# EAGLE board Adapter_board (EAGLE 7.7.0)
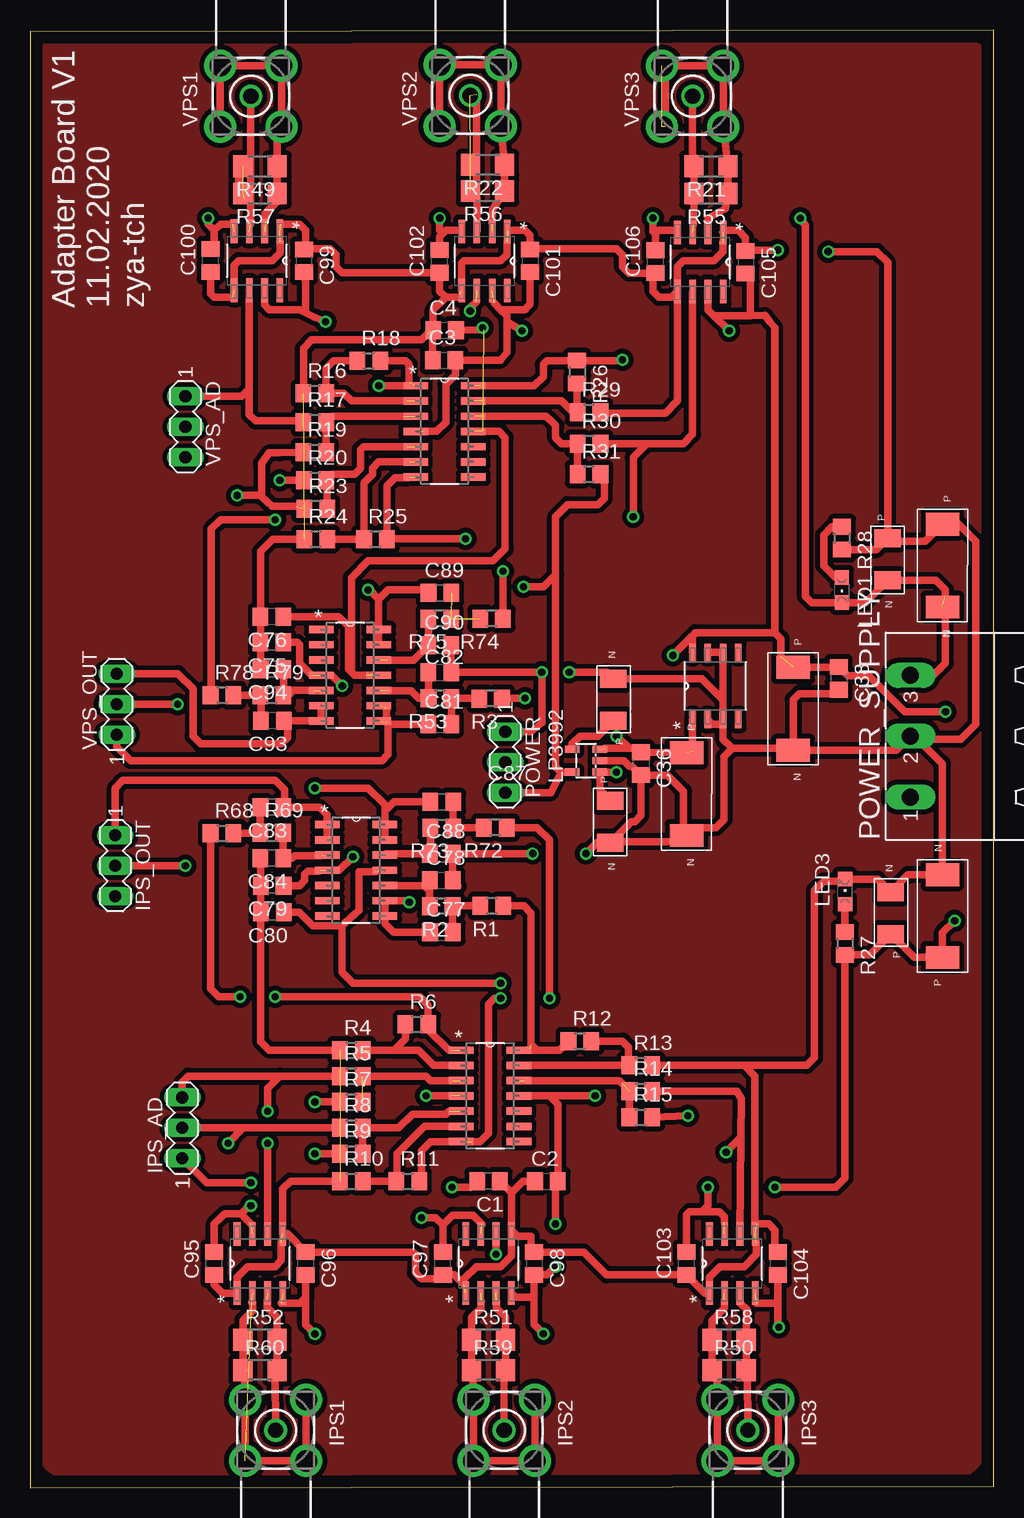
[diagram p0: board, top side]
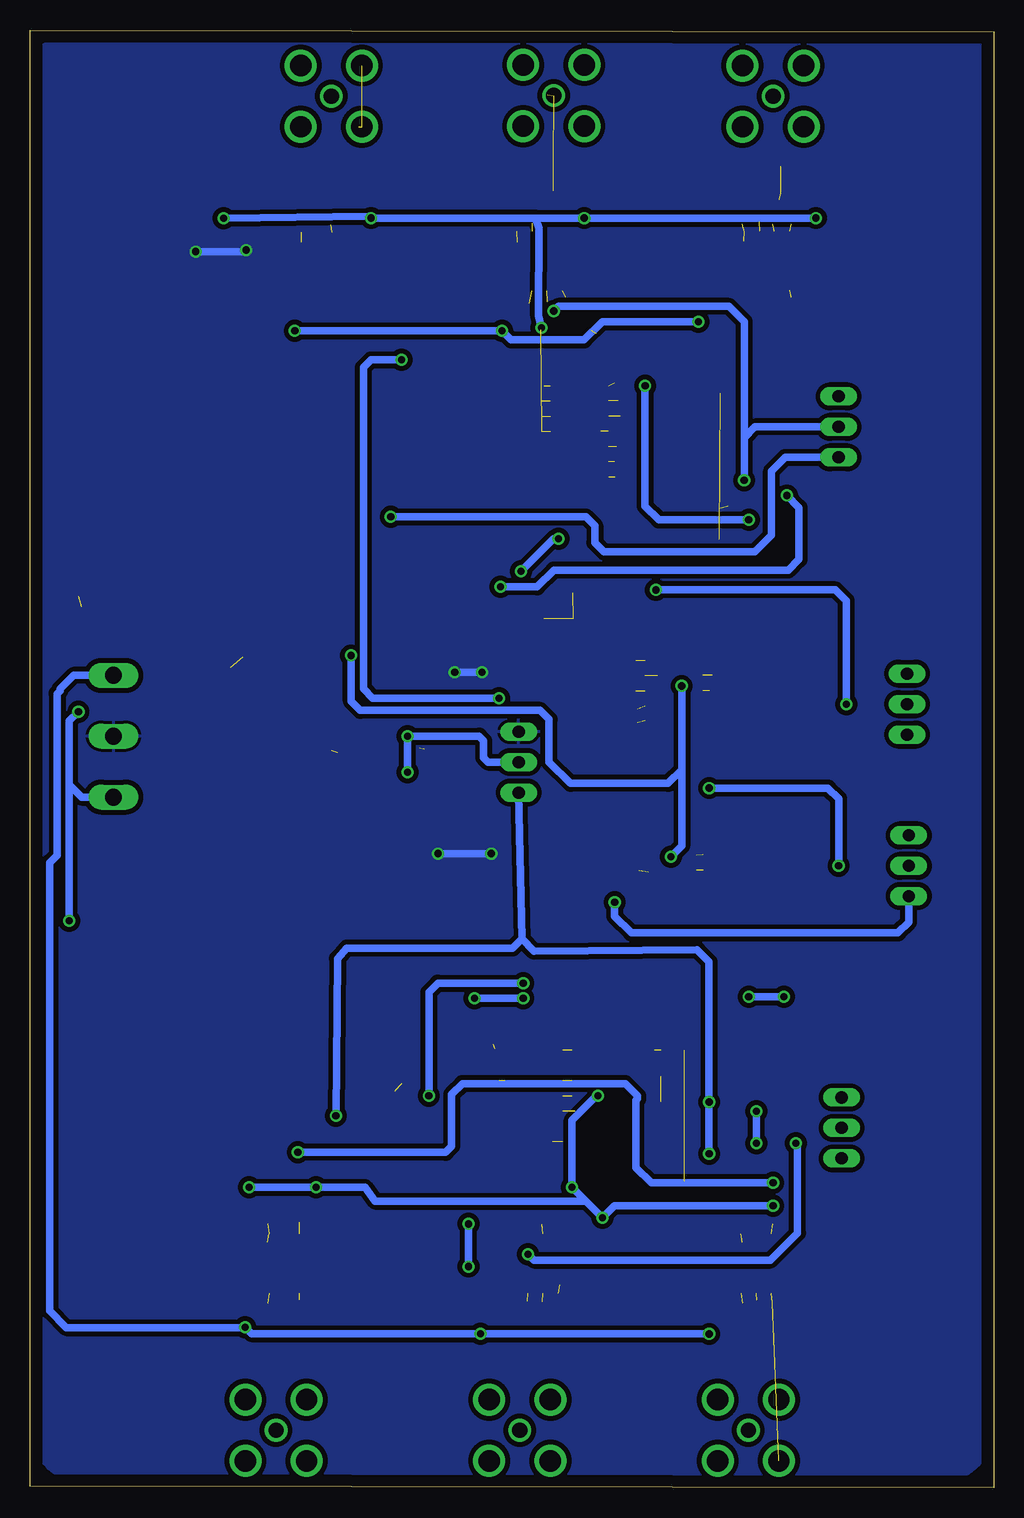
[diagram p1: board, bottom side, seen from below]

Size 80.37 x 121.46 mm. Coordinates in mm from the lower left corner, seen from the top.
Outline: 0,0 80.37,0.13 80.37,121.46 0,121.34 0,0
Copper layers (1*16): Top 0.035mm / dielectric 1.5mm / Bottom 0.035mm
Design rules "default *": minimum track width 10mil, minimum drill 24mil, track to track 8mil, track to pad 8mil, pad to pad 8mil, via to via 8mil, smd to smd 8mil, copper to edge 40mil, drill to drill 8mil, minimum pad ring 10mil, minimum via ring 8mil, stop-mask expansion 4mil, vias tented up to drill 0mil, thermal gap 10mil

## Footprints (pad centres in the part's own frame; a part is rotated, then mirrored left to right if it is on the bottom)
78L05CD15V5V_LIB = smd 1.422 x 0.533: 1 -2.927,1.787; 2 -2.927,0.517; 3 -2.927,-0.753; 4 -2.927,-2.023; 5 2.661,-2.023; 6 2.661,-0.753; 7 2.661,0.517; 8 2.661,1.787
C0805 = smd 1.3 x 1.5: 1 -0.95,0; 2 0.95,0
TANTALUM_C_10UF_KEM = smd 1.9 x 2.8: N 3.45,0; P -3.45,0
BU-SMA-H = drill 1.27: 1 0,0 | drill 1.778: 2 -2.55,2.55; 3 2.55,2.55; 4 2.55,-2.55; 5 -2.55,-2.55
MA03-1 = drill 1.016 long: 1 -2.54,0; 2 0,0; 3 2.54,0
CHIPLED_0805 = smd 1.2 x 1.2: A 0,-1.05; C 0,1.05
SOT23-5L = smd 0.6 x 1.2: 1 -0.95,-1.15; 2 0,-1.15; 3 0.95,-1.15; 4 0.95,1.15; 5 -0.95,1.15
MSTBA3 = drill 1.397 long: 1 -5.08,5.08; 2 0,5.08; 3 5.08,5.08
R0805 = smd 1.3 x 1.5: 1 -0.95,0; 2 0.95,0
R1206 = smd 1.6 x 1.803: 1 -1.422,0; 2 1.422,0
TL084/SO_OP_LIB = smd 2.057 x 0.61: 1 -2.261,3.81; 2 -2.261,2.54; 3 -2.261,1.27; 4 -2.261,0; 5 -2.261,-1.27; 6 -2.261,-2.54; 7 -2.261,-3.81; 8 2.54,-3.81; 9 2.54,-2.54; 10 2.54,-1.27; 11 2.54,0; 12 2.54,1.27; 13 2.54,2.54; 14 2.54,3.81
TANTALUM_C_1UF_KEM = smd 1.5 x 2.2: N 1.75,0; P -1.75,0
AD629_DIFFA_LIB = smd 1.981 x 0.559: 1 -2.464,1.905; 2 -2.464,0.635; 3 -2.464,-0.635; 4 -2.464,-1.905; 5 2.464,-1.905; 6 2.464,-0.635; 7 2.464,0.635; 8 2.464,1.905

## Placement (x,y rotation side)
78L05  78L05CD15V5VONLINE  [78L05CD15V5V_LIB]  57.02,66.93 90 top
C1  0.1u  [C0805]  38.23,25.53 180 top
C2  0.1u  [C0805]  43.05,25.53 0 top
C3  0.1u  [C0805]  34.52,93.95 0 top
C4  0.1u  [C0805]  34.57,96.44 0 top
C36  100n  [C0805]  50.93,60.32 270 top
C37  TANTALUM_C_10UF_KEM  [TANTALUM_C_10UF_KEM]  54.74,57.78 270 top
C38  100n  [C0805]  67.44,67.44 270 top
C75  0.1u  [C0805]  20.17,70.42 180 top
C76  0.1u  [C0805]  20.17,72.57 180 top
C77  2n  [C0805]  34.3,46.28 0 top
C78  1n  [C0805]  34.29,50.6 0 top
C79  0.1u  [C0805]  20.19,50.16 180 top
C80  0.1u  [C0805]  20.21,47.93 180 top
C81  2n  [C0805]  34.16,63.61 0 top
C82  1n  [C0805]  34.16,67.95 0 top
C83  2n  [C0805]  20.18,56.68 180 top
C84  1n  [C0805]  20.17,52.44 180 top
C87  2n  [C0805]  34.34,57.14 0 top
C88  1n  [C0805]  34.29,52.81 0 top
C89  2n  [C0805]  34.18,74.56 0 top
C90  1n  [C0805]  34.16,70.21 0 top
C93  2n  [C0805]  20.21,63.89 180 top
C94  1n  [C0805]  20.18,68.2 180 top
C95  0.1u  [C0805]  15.37,18.67 90 top
C96  0.1u  [C0805]  22.99,18.67 270 top
C97  0.1u  [C0805]  34.42,18.67 90 top
C98  0.1u  [C0805]  42.04,18.67 270 top
C99  0.1u  [C0805]  22.83,102.23 270 top
C100  0.1u  [C0805]  15.06,102.26 90 top
C101  0.1u  [C0805]  41.68,102.23 270 top
C102  0.1u  [C0805]  34.14,102.18 90 top
C103  0.1u  [C0805]  54.74,18.67 90 top
C104  0.1u  [C0805]  62.36,18.67 270 top
C105  0.1u  [C0805]  59.66,102.11 270 top
C106  0.1u  [C0805]  52.15,102.16 90 top
IPS1  BU-SMA-H  [BU-SMA-H]  20.49,4.78 270 top
IPS2  BU-SMA-H  [BU-SMA-H]  39.54,4.78 270 top
IPS3  BU-SMA-H  [BU-SMA-H]  59.86,4.78 270 top
IPS_AD  [MA03-1]  12.7,29.97 90 top
IPS_OUT  [MA03-1]  7.11,51.82 270 top
LED1  [CHIPLED_0805]  67.69,74.8 180 top
LED3  [CHIPLED_0805]  67.95,49.66 0 top
LP3992  LD398525RM  [SOT23-5L]  46.35,60.58 90 top
POWER  [MA03-1]  39.62,60.45 270 top
POWER_SUPPLY  MSTBA3  [MSTBA3]  78.49,62.61 90 top
R1  2.81k  [R0805]  38.51,48.46 180 top
R2  2.81k  [R0805]  34.28,48.44 180 top
R3  2.81k  [R0805]  38.4,65.75 180 top
R4  100k  [R0805]  26.8,36.45 0 top
R5  100k  [R0805]  26.8,34.29 0 top
R6  27.2k  [R0805]  32.26,38.61 0 top
R7  27.2k  [R0805]  26.8,32.13 0 top
R8  100k  [R0805]  26.8,29.97 0 top
R9  27.2k  [R0805]  26.8,27.81 0 top
R10  100k  [R0805]  26.8,25.53 0 top
R11  27.2k  [R0805]  31.5,25.53 0 top
R12  27.2k  [R0805]  45.85,37.21 0 top
R13  100k  [R0805]  50.93,35.18 0 top
R14  100k  [R0805]  50.93,33.02 0 top
R15  27.2k  [R0805]  50.93,30.86 0 top
R16  100k  [R0805]  23.75,91.19 0 top
R17  100k  [R0805]  23.75,88.77 0 top
R18  27.2k  [R0805]  28.24,93.9 0 top
R19  27.2k  [R0805]  23.75,86.28 0 top
R20  100k  [R0805]  23.77,83.95 0 top
R21  424  [R1206]  56.77,110.11 180 top
R22  424  [R1206]  38.15,110.24 180 top
R23  27.2k  [R0805]  23.83,81.58 0 top
R24  100k  [R0805]  23.83,79.04 0 top
R25  27.2k  [R0805]  28.8,79.04 0 top
R26  27.2k  [R0805]  45.62,92.96 270 top
R27  2k  [R0805]  67.95,45.34 270 top
R28  2k  [R0805]  67.69,79.12 270 top
R29  100k  [R0805]  46.61,89.61 0 top
R30  100k  [R0805]  46.61,87 0 top
R31  27.2k  [R0805]  46.61,84.45 0 top
R49  424  [R1206]  19.18,110.11 180 top
R50  500  [R1206]  58.29,9.78 0 top
R51  500  [R1206]  38.23,12.32 0 top
R52  500  [R1206]  19.18,12.32 0 top
R53  2.81k  [R0805]  34.18,65.77 180 top
R55  424  [R1206]  56.77,107.82 180 top
R56  424  [R1206]  38.15,108.05 180 top
R57  424  [R1206]  19.18,107.85 180 top
R58  500  [R1206]  58.29,12.32 0 top
R59  500  [R1206]  38.23,9.78 0 top
R60  500  [R1206]  19.18,9.78 0 top
R68  2.81k  [R0805]  16.01,54.53 0 top
R69  2.81k  [R0805]  20.15,54.55 0 top
R72  2.81k  [R0805]  38.8,55 180 top
R73  2.81k  [R0805]  34.33,54.99 180 top
R74  2.81k  [R0805]  38.48,72.42 180 top
R75  2.81k  [R0805]  34.16,72.42 180 top
R78  2.81k  [R0805]  16.01,66.04 0 top
R79  2.81k  [R0805]  20.17,66.04 0 top
U$1  TL084/SO_OPONLINE  [TL084/SO_OP_LIB]  38.23,32.64 0 top
U$2  TL084/SO_OPONLINE  [TL084/SO_OP_LIB]  34.42,88.01 0 top
U$3  TANTALUM_C_1UF_KEMTANTALUM_C_1UF_KEM  [TANTALUM_C_1UF_KEM]  48.39,55.5 270 top
U$4  TL084/SO_OPONLINE  [TL084/SO_OP_LIB]  27.05,51.43 0 top
U$5  TANTALUM_C_1UF_KEMTANTALUM_C_1UF_KEM  [TANTALUM_C_1UF_KEM]  48.64,65.66 90 top
U$6  TL084/SO_OPONLINE  [TL084/SO_OP_LIB]  26.54,67.69 0 top
U$10  TANTALUM_C_1UF_KEMTANTALUM_C_1UF_KEM  [TANTALUM_C_1UF_KEM]  71.76,47.88 90 top
U$11  TANTALUM_C_10UF_KEM  [TANTALUM_C_10UF_KEM]  76.07,47.62 90 top
U$12  TANTALUM_C_1UF_KEMTANTALUM_C_1UF_KEM  [TANTALUM_C_1UF_KEM]  71.5,77.34 270 top
U$14  TANTALUM_C_10UF_KEM  [TANTALUM_C_10UF_KEM]  76.07,76.84 270 top
U$24  AD629_DIFFAONLINE  [AD629_DIFFA_LIB]  19.18,18.67 90 top
U$27  AD629_DIFFAONLINE  [AD629_DIFFA_LIB]  38.23,18.67 90 top
U$28  AD629_DIFFAONLINE  [AD629_DIFFA_LIB]  18.92,102.23 270 top
U$29  AD629_DIFFAONLINE  [AD629_DIFFA_LIB]  37.9,102.21 270 top
U$30  AD629_DIFFAONLINE  [AD629_DIFFA_LIB]  58.55,18.67 90 top
U$31  AD629_DIFFAONLINE  [AD629_DIFFA_LIB]  55.88,102.13 270 top
U$66  TANTALUM_C_10UF_KEM  [TANTALUM_C_10UF_KEM]  63.63,64.9 270 top
VPS1  BU-SMA-H  [BU-SMA-H]  18.42,115.95 90 top
VPS2  BU-SMA-H  [BU-SMA-H]  36.7,116 90 top
VPS3  BU-SMA-H  [BU-SMA-H]  55.24,115.95 90 top
VPS_AD  [MA03-1]  12.95,88.39 270 top
VPS_OUT  [MA03-1]  7.24,65.28 90 top

## Library data of the parts
78L05 C37 U$1-U$6 U$10-U$12 U$14 U$24 U$27-U$31 U$66 = Submodule
C1-C4 C36 C38 C75-C84 C87-C90 C93-C106 R1-R31 R49-R53 R55-R60 R68 R69 R72-R75 R78 R79 = rcl
IPS1-IPS3 VPS1-VPS3 = con-coax; OC_FARNELL: unknown; OC_NEWARK: unknown
IPS_AD IPS_OUT POWER VPS_AD VPS_OUT = con-lstb; OC_FARNELL: unknown; OC_NEWARK: unknown
LED1 LED3 = led
LP3992 = st-microelectronics
POWER_SUPPLY = con-phoenix-508; MF: FARNELL; MPN: 1757255; OC_FARNELL: 3705183; OC_NEWARK: 71C4162

## Nets
1.5V_LP: LP3992.5 POWER.3 R7.1 R9.1 R15.2 R19.1 R23.1 R31.2
+5V_78L05: 78L05.1 C36.1 C37.P LP3992.1 LP3992.3 POWER.2 U$3.P
+15V_TMA: 78L05.8 C1.2 C3.2 C38.1 C75.1 C79.1 C95.2 C97.2 C99.2 C101.2 C103.2 C105.2 POWER_SUPPLY.1 R27.2 U$1.4 U$2.4 U$4.4 U$6.4 U$10.P U$11.P U$24.7 U$27.7 U$28.7 U$29.7 U$30.7 U$31.7 U$66.P
-15V_TMA: C2.2 C4.2 C76.1 C80.1 C96.2 C98.2 C100.2 C102.2 C104.2 C106.2 LED1.C POWER_SUPPLY.3 U$1.11 U$2.11 U$4.11 U$6.11 U$12.N U$14.N U$24.4 U$27.4 U$28.4 U$29.4 U$30.4 U$31.4
GND_DIG: 78L05.2 78L05.3 78L05.6 78L05.7 C1.1 C2.1 C3.1 C4.1 C36.2 C37.N C38.2 C75.2 C76.2 C78.2 C79.2 C80.2 C82.2 C84.2 C88.2 C90.2 C94.2 C95.1 C96.1 C97.1 C98.1 C99.1 C100.1 C101.1 C102.1 C103.1 C104.1 C105.1 C106.1 LED3.C LP3992.2 POWER.1 POWER_SUPPLY.2 R4.1 R10.1 R13.2 R16.1 R24.1 R28.2 R29.2 U$3.N U$5.N U$10.N U$11.N U$12.P U$14.P U$24.1 U$24.5 U$27.1 U$27.5 U$28.1 U$28.5 U$29.1 U$29.5 U$30.1 U$30.5 U$31.1 U$31.5 U$66.N
IPS1_AD: IPS_AD.3 R5.1 U$24.6
IPS1_FILTER: C84.1 R69.2 U$4.3
IPS1_N: IPS1.2 IPS1.3 IPS1.4 IPS1.5 R52.1 R60.1 U$24.2
IPS1_OUT: C83.1 IPS_OUT.1 U$4.1 U$4.2
IPS1_P: IPS1.1 R52.2 R60.2 U$24.3
IPS1_SH: R6.2 R68.1 U$1.1
IPS2_AD: IPS_AD.2 R8.1 U$27.6
IPS2_FILTER: C88.1 R73.2 U$4.12
IPS2_N: IPS2.2 IPS2.3 IPS2.4 IPS2.5 R51.1 R59.1 U$27.2
IPS2_OUT: C87.1 IPS_OUT.2 U$4.13 U$4.14
IPS2_P: IPS2.1 R51.2 R59.2 U$27.3
IPS2_SH: R11.2 R72.1 U$1.7
IPS3_AD: IPS_AD.1 R14.2 U$30.6
IPS3_FILTER: C78.1 R2.2 U$4.10
IPS3_N: IPS3.2 IPS3.3 IPS3.4 IPS3.5 R50.1 R58.1 U$30.2
IPS3_OUT: C77.1 IPS_OUT.3 U$4.8 U$4.9
IPS3_P: IPS3.1 R50.2 R58.2 U$30.3
IPS3_SH: R1.1 R12.1 U$1.14
N$2: LP3992.4 U$5.P
N$3: R4.2 R6.1 U$1.2
N$4: R5.2 R7.2 U$1.3
N$5: R16.2 R18.1 U$2.2
N$6: R10.2 R11.1 U$1.6
N$7: R8.2 R9.2 U$1.5
N$8: R17.2 R19.2 U$2.3
N$9: C77.2 R1.2 R2.1
N$10: C81.2 R3.2 R53.1
N$11: C83.2 R68.2 R69.1
N$12: LED3.A R27.1
N$14: LED1.A R28.1
N$15: C87.2 R72.2 R73.1
N$16: R20.2 R23.2 U$2.5
N$17: C89.2 R74.2 R75.1
N$19: C93.2 R78.2 R79.1
N$20: R12.2 R13.1 U$1.13
N$21: R14.1 R15.1 U$1.12
N$22: R24.2 R25.1 U$2.6
N$23: R26.2 R29.1 U$2.13
N$24: R30.1 R31.1 U$2.12
VPS1_AD: R17.1 U$28.6 VPS_AD.1
VPS1_FILTER: C94.1 R79.2 U$6.5
VPS1_N: R49.1 R57.1 U$28.2 VPS1.2 VPS1.3 VPS1.4 VPS1.5
VPS1_OUT: C93.1 U$6.6 U$6.7 VPS_OUT.3
VPS1_P: R49.2 R57.2 U$28.3 VPS1.1
VPS1_SH: R18.2 R78.1 U$2.1
VPS2_AD: R20.1 U$29.6 VPS_AD.2
VPS2_FILTER: C90.1 R75.2 U$6.12
VPS2_N: R22.1 R56.1 U$29.2 VPS2.2 VPS2.3 VPS2.4 VPS2.5
VPS2_OUT: C89.1 U$6.13 U$6.14 VPS_OUT.2
VPS2_P: R22.2 R56.2 U$29.3 VPS2.1
VPS2_SH: R25.2 R74.1 U$2.7
VPS3_AD: R30.2 U$31.6 VPS_AD.3
VPS3_FILTER: C82.1 R53.2 U$6.10
VPS3_N: R21.1 R55.1 U$31.2 VPS3.2 VPS3.3 VPS3.4 VPS3.5
VPS3_OUT: C81.1 U$6.8 U$6.9 VPS_OUT.1
VPS3_P: R21.2 R55.2 U$31.3 VPS3.1
VPS3_SH: R3.1 R26.1 U$2.14

## Tracks (layer width: path | path; a pad name or v marks a point on that pad's centre or on a via)
1.5V_LP  (via drill 0.6)  (1 unrouted)
  Top 0.61: 44.26,59.63 LP3992.5 | 44.26,59.63 43.81,60.07 43.81,76.07 | 43.81,76.07 43.81,80.9 44.83,81.92 47.37,81.92 47.88,82.42 47.88,84.14 R31.2 | R19.1 20.83,86.23 19.94,86.23 19.3,85.34 19.3,82.55 | 19.3,82.55 20.19,81.79 22.2,81.79 | 19.3,82.55 19.18,82.68 v17.27,82.68 | v41.15,75.06 42.8,75.06 43.81,76.07 | POWER.3 43.43,57.91 44.26,59.63 | v54.86,30.99 R15.2 | R7.1 v23.75,32.13 | v23.75,27.81 R9.1
  Bottom 0.61: v17.27,82.68 16.26,81.66 16.26,77.34 17.14,76.45 36.7,76.45 38.1,75.06 v41.15,75.06 | POWER.3 39.37,45.72 | 39.37,45.72 40.13,44.96 53.97,44.96 54.74,44.07 v54.86,30.99 | 39.37,45.72 38.35,44.7 24.77,44.83 23.75,43.81 v23.75,32.13 v23.75,27.81
+5V_78L05  (via drill 0.6)  (2 unrouted)
  Top 0.61: 78L05.1 55.24,63.99 55.24,61.39 | 50.04,61.59 50.61,61.59 C36.1 C37.P | 50.04,61.59 47.88,61.59 | U$3.P 47.5,58.13 LP3992.1 v48.89,59.6 | v48.89,62.61 50.04,61.59
  Bottom 0.61: v48.89,59.6 v48.89,62.61 42.93,62.61 42.54,62.23 42.54,60.83 42.16,60.45 POWER.2
+15V_TMA  (via drill 0.6)  (9 unrouted)
  Top 0.61: U$66.P 67.4,68.35 C38.1 68.18,67.65 69.95,67.65 72.95,64.64 v76.33,64.64 | C79.1 22.47,50.16 22.91,50.61 22.91,51.1 23.17,51.36 24.12,51.36 24.21,51.45 | C75.1 22.29,70.42 22.48,70.23 22.48,68.71 23.5,67.69 | C103.2 54.74,22.73 54.99,22.99 56.01,22.99 | 57.91,22.1 57.91,22.57 57.49,22.99 56.01,22.99 | 34.42,21.89 C97.2 | 34.42,21.89 35.23,22.71 36.92,22.71 37.67,21.96 | C95.2 15.37,21.97 15.87,22.48 15.89,22.48 16.22,22.81 17.58,22.81 | 18.42,21.97 18.06,22.33 17.58,22.81 | v62.1,25.02 67.18,25.02 67.95,25.78 R27.2 70.02,44.39 U$10.P 73.71,44.17 U$11.P 76.07,46.23 v77.09,47.24 | v56.52,25.02 56.52,23.5 56.01,22.99 | v32.64,22.48 33.83,22.48 34.42,21.89 | v18.42,23.5 18.27,23.5 17.58,22.81 | v35.18,25.02 36.77,25.02 C1.2 | v33.02,32.64 35.18,32.64 | C101.2 41.68,98.6 41.51,98.43 41.27,98.17 39.24,98.17 | 39.24,98.17 38.73,98.68 | 78L05.8 55.23,70.93 | 55.23,70.93 55.5,71.25 62.1,71.25 | 62.1,71.25 62.61,70.74 62.61,69.22 | 62.1,71.25 62.1,96.65 61.68,97.14 61.25,97.68 60.07,97.66 | 60.07,97.66 60.07,100.71 C105.2 | U$31.7 56.52,98.17 57.02,97.66 | 57.02,97.66 60.07,97.66 | 39.75,97.16 39.75,94.62 39.22,93.95 C3.2 35.47,92.75 34.67,91.95 34.67,88.77 33.91,88.01 32.77,88.01 | 39.75,97.16 39.75,97.66 39.24,98.17 | 57.02,97.66 v58.29,96.39 | v41.02,96.39 39.75,97.16 | v24.64,97.16 23.75,97.54 22.99,97.92 | 22.99,97.92 22.97,99.86 22.99,100.46 C99.2 | U$28.7 19.56,98.55 19.94,98.17 22.23,98.17 22.47,98.16 22.99,97.92 | U$6.4 25.15,67.69 v26.04,66.8 | v26.92,52.58 25.78,51.43 U$4.4 | v53.59,69.34 55.18,70.93 55.23,70.93
  Bottom 0.61: 77.09,58.55 76.07,57.53 POWER_SUPPLY.1 | v76.33,64.64 77.09,63.88 77.09,58.55 | v62.1,25.02 v56.52,25.02 52.45,25.02 51.59,23.88 34.04,23.88 | v18.42,23.5 31.62,23.5 v32.64,22.48 34.04,23.88 | 34.04,23.88 v35.18,25.02 35.18,30.61 33.15,32.64 v33.02,32.64 | v58.29,96.39 v41.02,96.39 40.26,95.63 34.16,95.63 32.64,97.16 v24.64,97.16 | v26.04,66.8 26.04,59.82 | 26.04,59.82 26.04,53.47 v26.92,52.58 | 26.04,59.82 27.18,58.67 35.31,58.67 37.08,60.45 37.08,64.01 37.85,64.77 52.83,64.77 53.59,65.53 v53.59,69.34 | v77.09,47.24 77.09,58.55
-15V_TMA  (via drill 0.6)  (8 unrouted)
  Top 0.61: C96.2 22.99,15.87 | 22.99,15.87 22.48,15.37 20.96,15.37 | 42.01,16.1 41.78,15.87 40.46,15.87 U$27.4 | C104.2 62.36,15.62 | 62.36,15.62 62.1,15.37 60.58,15.37 | POWER_SUPPLY.3 75.31,67.69 76.33,68.71 76.33,73.13 U$14.N | 76.33,74.3 76.33,74.8 75.54,75.59 U$12.N 69.66,73.75 LED1.C 65.19,73.75 64.64,74.3 64.64,105.21 v64.24,105.77 | 52.15,104.47 C106.2 | 52.15,104.47 52.45,104.78 53.8,104.78 U$31.4 | 62.36,15.62 62.36,13.44 v62.43,13.36 | v42.8,12.83 42.01,13.61 42.01,16.1 | 42.01,16.1 42.04,16.13 C98.2 43.12,17.72 v43.81,18.42 | v23.75,12.8 22.99,13.56 22.99,15.87 | v43.81,21.97 43.81,25.34 C2.2 44,31.94 43.31,32.64 | 43.31,32.64 U$1.11 | C100.2 15.37,103.52 15.37,104.78 | 15.37,104.78 15.87,105.28 16.89,105.28 | 26.03,46.81 23.55,46.81 22.43,47.93 C80.1 | 26.03,46.81 26.33,47.11 27.42,48.12 27.43,51.31 28.83,51.31 | C76.1 25.73,72.57 26.54,71.76 26.54,68.2 26.8,67.95 | 26.8,67.95 27.05,67.69 28.07,67.69 | C102.2 34.14,104.24 34.42,104.52 | U$29.4 35.89,104.78 34.67,104.78 34.42,104.52 | v51.94,105.79 51.94,104.67 52.15,104.47 | v34.16,105.79 34.16,104.78 34.42,104.52 | v14.86,105.79 14.86,105.28 15.37,104.78 | C4.2 37.82,96.47 v37.72,96.65 | 43.31,32.64 v47.12,32.64 | v39.24,42.04 26.92,42.04 26.03,42.93 26.03,46.81 | 26.8,67.95 26.8,75.82 28.19,77.22 38.61,77.22 39.62,78.23 39.62,87.5 39.12,88.01 37.72,88.01
  Bottom 0.61: 72.77,67.69 POWER_SUPPLY.3 76.71,67.69 77.85,66.55 77.85,66.42 78.11,66.17 78.11,52.7 78.74,52.07 78.74,14.73 77.34,13.33 62.46,13.33 v62.43,13.36 61.9,12.83 v42.8,12.83 23.77,12.83 v23.75,12.8 | v43.81,18.42 v43.81,21.97 | v64.24,105.77 52.08,105.93 v51.94,105.79 38.23,105.79 | 38.23,105.79 v34.16,105.79 v14.86,105.79 | v37.72,96.65 37.97,97.64 37.95,104.93 38.23,105.79 | v47.12,32.64 47.12,41.27 46.35,42.04 v39.24,42.04
GND_DIG  (via drill 0.6)  (13 unrouted)
  Top 0.61: R10.1 21.72,25.53 21.08,24.89 U$24.5 21.47,21.13 C96.1 31.94,19.62 32.13,19.43 32.13,17.91 32.64,17.4 34.1,17.4 C97.1 35.37,17.72 36.2,16.89 36.2,17.4 37.21,18.42 39.24,18.42 40.13,19.3 U$27.5 40.13,21.46 | 40.13,24.57 40.13,21.46 | 40.13,24.57 C1.1 | U$66.N 63.48,61.59 58.55,61.59 | 58.55,61.59 57.78,62.37 57.78,63.63 | 57.78,63.63 78L05.3 57.78,65.66 | 78L05.2 56.88,63.63 57.78,63.63 | C37.N 55.39,54.99 57.2,54.99 57.86,55.65 57.86,60.91 58.55,61.59 | C104.1 62.1,19.87 62.1,21.46 61.59,21.97 60.58,21.97 | C95.1 15.37,16.89 16.05,16.21 U$24.1 17.27,17.53 18.16,18.42 20.45,18.42 20.96,18.92 20.96,20.45 | C37.N 54.23,53.83 48.75,53.83 | C37.N 54.48,54.59 54.48,58.04 53.15,59.38 C36.2 | C36.2 50.18,60.12 49.97,60.12 49.5,60.58 LP3992.2 | C36.2 50.93,56.01 50.42,55.5 50.14,55.5 U$3.N 47.27,53.75 v46.35,52.83 | 60.58,20.45 60.58,19.43 59.56,18.42 57.53,18.42 56.64,17.53 U$30.1 56.25,16.21 C103.1 48.07,17.72 46.17,19.62 C98.1 41.78,19.87 41.78,20.96 40.64,20.96 40.13,21.46 | U$66.N 72.24,61.45 POWER_SUPPLY.2 73.79,62.61 74.04,62.36 | 74.04,62.36 76.07,60.32 U$11.N 73.2,51.07 U$10.N 70.68,50.71 LED3.C 67.78,50.55 66.17,50.55 65.41,49.78 65.41,35.81 64.77,35.18 59.56,35.18 | R28.2 70.58,78.17 U$12.P 71.5,102.11 70.61,103 v66.55,103 | 72.26,78.87 74.66,78.87 U$14.P 77.45,80.29 78.87,78.87 78.87,63.63 77.6,62.36 74.04,62.36 | C38.2 67.12,66.17 64.14,66.17 63.63,65.66 U$66.N | 57.78,65.66 78L05.6 78L05.7 | 57.78,65.66 56.03,67.41 U$5.N 48.1,67.95 v44.96,67.95 | C2.1 41.09,25.53 40.13,24.57 | 34.67,99.19 34.16,99.7 34.16,101.21 C102.1 26.05,101.23 26.04,101.22 25.53,101.73 25.53,102.74 25.02,103.25 22.9,103.25 C99.1 22.99,103.34 22.99,104.78 22.48,105.28 20.96,105.28
  Top 0.61: 34.67,99.19 35.69,99.19 | U$31.1 57.96,104.78 59.05,104.78 59.66,104.17 C105.1 59.73,103.12 v62.36,103.12 | U$31.5 53.97,101.73 54.48,102.23 57.02,102.23 57.78,103 57.78,103.76 | U$29.5 35.99,102.03 36.2,102.23 39.24,102.23 39.75,102.74 39.75,103.76 | U$28.5 17.02,101.85 17.4,102.23 20.19,102.23 20.85,102.9 20.85,103.86 | C3.1 33.57,96.39 C4.1 33.62,98.14 34.67,99.19 | C100.1 15.06,99.49 15.37,99.19 16.89,99.19 | 35.7,50.14 C78.2 C88.2 41.88,52.81 v41.91,52.83 | C80.2 C79.2 19.24,52.41 C84.2 | C80.2 | C94.2 19.23,70.41 C75.2 C76.2 19.22,78.02 20.24,79.05 R24.1 | U$30.5 60.45,34.29 59.56,35.18 | 59.56,35.18 R13.2 | U$31.5 53.97,90.55 52.96,89.54 47.63,89.54 R29.2 | R16.1 22.8,94.94 23.5,95.63 32.64,95.63 33.15,96.14 | U$31.5 53.95,99.67 53.47,99.19 52.45,99.19 51.94,99.7 51.94,101.01 C106.1 49.92,101.21 49.4,101.73 49.4,102.74 48.89,103.25 41.75,103.25 C101.1 41.68,104.37 41.27,104.78 39.9,104.78 U$29.1 | R4.1 19.94,36.45 19.24,37.14 C80.2 | C90.2 C82.2 v42.67,67.95 42.67,63.75 41.78,62.99 POWER.1
  Bottom 0.61: v41.91,52.83 v46.35,52.83 | v42.67,67.95 v44.96,67.95 | v66.55,103 62.48,103 v62.36,103.12
  pour Bottom (isolate 0.406): 0.38,119.13 0.38,3.68 arc90 4.83,0.64 76.84,0.76 arc90 79.76,3.68 79.76,119.38 arc90 78.74,120.4 3.3,120.9 arc90
GND_DIG1
  pour Top (isolate 0.406): 0.38,118.36 0.38,3.81 arc90 3.81,0.64 76.2,0.76 arc90 79.76,3.3 79.76,119.38 arc90 78.11,120.4 2.67,120.9 arc90
IPS1_AD  (via drill 0.6)
  Top 0.61: IPS_AD.3 12.7,33.78 13.21,34.29 20.83,34.29 | 20.83,34.29 R5.1 | U$24.6 v19.81,28.7 | v19.81,31.37 19.81,33.27 20.83,34.29
  Bottom 0.61: v19.81,28.7 v19.81,31.37
IPS1_FILTER  (1 unrouted)
  Top 0.61: R69.2 C84.1 21.84,52.44 22.07,52.67 24.23,52.67 24.28,52.72
IPS1_N  (2 unrouted)
  Top 0.61: IPS1.2 IPS1.3 17.96,2.22 17.95,2.24 | IPS1.4 IPS1.5 17.9,9.64 R60.1 R52.1 17.76,13.94 18.54,14.73 18.54,15.47 18.52,15.49 18.48,15.46
IPS1_OUT
  Top 0.61: U$4.2 U$4.1 24.77,55.27 24.77,56.06 24.14,56.68 C83.1 21.21,56.76 21.21,58.17 20.45,58.93 7.75,58.93 7.11,58.29 IPS_OUT.1
IPS1_P  (1 unrouted)
  Top 0.61: IPS1.1 20.45,9.63 R60.2 20.6,12.01 20.45,12.17 R52.2 20.6,14.17 19.76,15.01 19.76,15.6
IPS1_SH  (via drill 0.6)  (1 unrouted)
  Top 0.61: 35.18,36.45 34.92,36.45 33.21,38.17 R6.2 33.21,40.2 32.51,40.89 v20.45,40.89 | v17.53,40.89 15.75,40.89 15.06,41.58 R68.1
  Bottom 0.61: v20.45,40.89 v17.53,40.89
IPS2_AD  (via drill 0.6)
  Top 0.61: R8.1 17.78,29.97 | 17.78,29.97 IPS_AD.2 | U$27.6 38.86,19.47 v38.84,19.45 | v16.51,28.7 17.78,29.97
  Bottom 0.61: v38.84,19.45 38.33,18.94 18.65,18.94 16.38,21.21 16.38,28.58 v16.51,28.7
IPS2_FILTER
  Top 0.61: U$4.12 29.69,52.81 C88.1 33.38,52.84 R73.2
IPS2_N  (1 unrouted)
  Top 0.61: IPS2.2 IPS2.3 IPS2.4 IPS2.5 36.95,9.64 R59.1 R51.1 36.8,14.17 37.59,14.96 37.59,15.42 37.64,15.47
IPS2_OUT  (via drill 0.6)
  Top 0.61: U$4.14 U$4.13 | C87.1 30.34,57.14 29.59,56.39 U$4.14 | IPS_OUT.2 v12.95,51.82 | U$4.14 29.59,56.9 28.19,58.29 v23.75,58.29
  Bottom 0.61: v12.95,51.82 12.95,57.4 13.84,58.29 v23.75,58.29
IPS2_P  (1 unrouted)
  Top 0.61: IPS2.1 39.53,9.96 R59.2 R51.2 39.65,14.22 38.91,14.96 38.91,15.49 38.89,15.52
IPS2_SH  (via drill 0.6)  (1 unrouted)
  Top 0.61: U$1.7 33.4,28.83 32.64,28.07 32.64,25.72 R11.2 | R72.1 42.28,55 43.31,53.97 v43.31,40.77 | v39.24,40.77 38.73,40.77 38.23,40.26 38.23,29.52 37.54,28.83 36.79,28.83
  Bottom 0.61: v43.31,40.77 v39.24,40.77
IPS3_AD  (via drill 0.6)
  Top 0.61: U$30.6 59.27,29.21 | 59.27,29.21 59.31,32.38 58.93,33.02 R14.2 | IPS_AD.1 14.73,25.4 v18.42,25.4 | v58.04,27.94 59.27,29.17 59.27,29.21
  Bottom 0.61: v18.42,25.4 28.58,25.4 29.85,26.67 29.85,32.26 29.72,32.38 29.72,32.64 30.73,33.65 44.32,33.65 45.21,32.77 45.21,28.45 45.72,27.94 v58.04,27.94
IPS3_FILTER
  Top 0.61: 32.91,50.16 U$4.10 | 32.91,50.16 C78.1 | R2.2 33.33,49.75 32.91,50.16
IPS3_N  (1 unrouted)
  Top 0.61: IPS3.2 IPS3.3 IPS3.4 IPS3.5 57.27,9.38 R50.1 R58.1 56.87,13.89 57.91,14.93 57.91,15.65
IPS3_OUT  (via drill 0.6)
  Top 0.61: C77.1 30.3,46.28 29.59,46.99 U$4.8 U$4.9 31.5,48.89 v31.62,48.77
  Bottom 0.61: v31.62,48.77 31.62,47.62 30.23,46.23 8,46.23 7.11,47.12 IPS_OUT.3
IPS3_P
  Top 0.254: U$30.3 59.18,15.42 59.4,15.2
  Top 0.61: 59.82,14.78 59.71,14.88 | 59.71,14.88 59.4,15.2 59.23,15.37 | IPS3.1 59.82,9.68 R50.2 R58.2 59.71,14.88
IPS3_SH  (1 unrouted)
  Top 0.61: 41.63,36.55 41.53,36.45 | 42.29,36.45 U$1.14 | 42.29,36.45 44.13,36.45 R12.1 | R1.1 41.2,48.46 41.78,47.88 41.78,36.96 42.29,36.45
N$2
  Top 0.61: U$5.P 47.34,62.61 45.85,62.61 45.2,61.97 LP3992.4
N$3  (1 unrouted)
  Top 0.61: U$1.2 33.65,35.18 32.38,36.45 30.35,36.45 | 30.35,36.45 28.32,36.45 | R6.1 31.31,37.4 30.35,36.45
N$4  (2 unrouted)
  Top 0.61: R5.2 33.02,34.29 33.4,33.91 35.18,33.91
N$5  (1 unrouted)
  Top 0.61: R18.1 25.32,93.9 24.7,93.28 R16.2 26.16,91.19 26.8,90.55 31.37,90.55
N$6
  Top 0.61: R10.2 R11.1 30.61,25.59 30.61,27.81 32.89,30.1 U$1.6
N$7  (1 unrouted)
  Top 0.61: 34.92,31.37 34.67,31.12 31.88,31.12 30.73,29.97 R8.2 R9.2
N$8  (1 unrouted)
  Top 0.61: 31.13,89.29 25.22,89.29 R17.2 R19.2
N$9
  Top 0.61: R1.2 35.25,48.46 R2.1 35.23,46.3 C77.2
N$10
  Top 0.61: R3.2 37.43,65.77 R53.1 35.13,63.63 C81.2
N$11
  Top 0.61: R68.2 19.19,54.53 R69.1 19.21,56.65 C83.2
N$12
  Top 0.61: LED3.A R27.1
N$14
  Top 0.61: LED1.A 67.15,75.85 66.17,76.84 66.17,79.38 66.86,80.07 R28.1
N$15
  Top 0.61: R72.2 R73.1 35.28,57.12 C87.2
N$16  (1 unrouted)
  Top 0.61: 31.5,86.74 27.81,86.74 27.56,86.49 27.56,84.96 27.05,84.45 25.23,84.45 R20.2 24.78,83.9 R23.2
N$17  (2 unrouted)
N$19
  Top 0.61: R78.2 R79.1 19.26,66 C93.2
N$20
  Top 0.61: U$1.13 R13.1 49.91,35.24 49.91,36.7 49.4,37.21 R12.2
N$21  (2 unrouted)
  Top 0.61: 41.27,33.91 49.15,33.91 49.4,33.65 | R15.1 R14.1
N$22  (1 unrouted)
  Top 0.61: R24.2 R25.1 27.85,83.73 28.58,84.45 28.58,84.96 29.08,85.47 31.62,85.47
N$23  (1 unrouted)
  Top 0.61: R26.2 45.62,89.65 R29.1 45.26,89.61 44.32,90.55 37.72,90.55
N$24  (1 unrouted)
  Top 0.61: 37.72,89.29 43.02,89.29 43.28,89.03 43.31,89.03 43.81,88.52 43.81,87.5 44.32,87 R30.1 R31.1
VPS1_AD
  Top 0.61: U$28.6 18.29,91.57 | 18.29,91.57 18.29,89.41 18.8,88.9 22.67,88.9 R17.1 | VPS_AD.1 17.65,90.93 18.29,91.57
VPS1_FILTER  (1 unrouted)
  Top 0.61: 23.74,66.41 23.74,66.42 23.72,66.43 21.96,66.43 21.57,66.04 R79.2 21.13,66.05 C94.1
VPS1_N  (1 unrouted)
  Top 0.61: VPS1.2 VPS1.3 VPS1.4 VPS1.5 20.6,113.04 R49.1 R57.1 20.6,107.16 19.61,106.17 19.61,105.49
VPS1_OUT
  Top 0.61: 24.27,63.89 C93.1 21.46,63.59 21.46,62.48 20.96,61.98 14.22,61.98 13.59,62.61 13.59,66.55 12.32,67.82 VPS_OUT.3 | 24.27,63.89 U$6.7 | U$6.6 24.28,63.91 24.27,63.89
VPS1_P  (3 unrouted)
  Top 0.61: VPS1.1 18.42,110.87 | 18.42,110.87 18.42,105.28 | 18.42,110.87 17.4,109.86 17.4,107.82 17.91,107.31
VPS1_SH  (via drill 0.6)  (1 unrouted)
  Top 0.61: R18.2 31.32,93.9 31.62,93.6 31.62,92.08 | U$2.1 v29.08,91.82 | 15.24,66.22 15.15,66.13 | 15.15,66.13 R78.1 | v20.45,80.65 15.87,80.65 15.11,79.88 15.11,66.17 15.15,66.13
  Bottom 0.61: v29.08,91.82 29.08,81.79 27.94,80.65 v20.45,80.65
VPS2_AD  (via drill 0.6)  (1 unrouted)
  Top 0.61: R20.1 v20.83,83.95 | v36.7,98.04 36.7,98.3 37.21,98.81
  Bottom 0.61: v20.83,83.95 20.83,87.5 | 20.83,87.5 20.83,97.16 22.1,98.43 36.32,98.43 v36.7,98.04 | VPS_AD.2 19.94,88.39 20.83,87.5
VPS2_FILTER  (1 unrouted)
  Top 0.61: 29.85,68.96 31.97,68.96 C90.1 R75.2
VPS2_N  (1 unrouted)
  Top 0.61: VPS2.2 VPS2.3 VPS2.4 VPS2.5 R22.1 R56.1 38.56,106.5 38.53,105.36
VPS2_OUT  (via drill 0.6)
  Top 0.61: U$6.13 U$6.14 29.08,74.04 | 29.08,74.04 29.85,74.8 32.98,74.8 C89.1 | VPS_OUT.2 v12.32,65.28 | v28.19,74.8 28.32,74.8 29.08,74.04
  Bottom 0.61: v12.32,65.28 12.32,73.91 13.21,74.8 v28.19,74.8
VPS2_P  (3 unrouted)
  Top 0.61: U$29.3 37.21,110.36 37.21,116.08
VPS2_SH  (via drill 0.6)  (1 unrouted)
  Top 0.61: 31.6,84.19 31.61,84.2 31.61,84.21 31.56,84.16 30.44,84.16 29.75,83.48 R25.2 29.78,79.07 v36.31,79.07 | R74.1 v39.43,76.35
  Bottom 0.61: v39.43,76.35 36.72,79.07 v36.31,79.07
VPS3_AD  (via drill 0.6)
  Top 0.61: U$31.6 55.24,87.76 54.48,87 51.43,87 | 51.43,87 R30.2 | 51.43,87 50.29,85.85 v50.29,80.9
  Bottom 0.61: v50.29,80.9 34.04,80.9 33.27,80.14 33.27,78.74 32.51,77.98 19.94,77.98 18.54,79.38 18.54,84.71 17.4,85.85 VPS_AD.3
VPS3_FILTER  (1 unrouted)
  Top 0.61: 29.85,66.42 31.75,66.42 32.4,65.77 R53.2 33.21,65.79 C82.1
VPS3_N  (2 unrouted)
  Top 0.61: U$31.2 56.52,105.79 57.53,106.3 57.96,106.55 R55.1 R21.1 VPS3.5 VPS3.4 52.96,118.49 52.96,113.41
VPS3_OUT  (2 unrouted)
  Top 0.61: C81.1 29.86,63.61 | 29.86,63.61 29.72,63.75 29.72,64.9 | VPS_OUT.1 7.24,61.72 8.38,60.58 29.34,60.58 29.86,61.1 29.86,63.61
VPS3_P  (1 unrouted)
  Top 0.61: VPS3.1 55.24,111.3 R21.2 R55.2 55.3,105.23
VPS3_SH  (via drill 0.6)  (1 unrouted)
  Top 0.61: 37.53,91.81 42.02,91.81 42.8,92.58 42.8,93.6 43.11,93.91 R26.1 49.34,93.91 v49.4,93.98 | R3.1 39.39,65.79 v41.27,65.79
  Bottom 0.61: v41.27,65.79 51.82,65.79 52.58,66.55 52.58,93.34 51.94,93.98 v49.4,93.98

## Text on the board
tNames: Adapter Board V1 / 11.02.2020 / zya-tch